# EAGLE board M6_GPOI_V4.1_after_labelling (EAGLE 9.6.2)
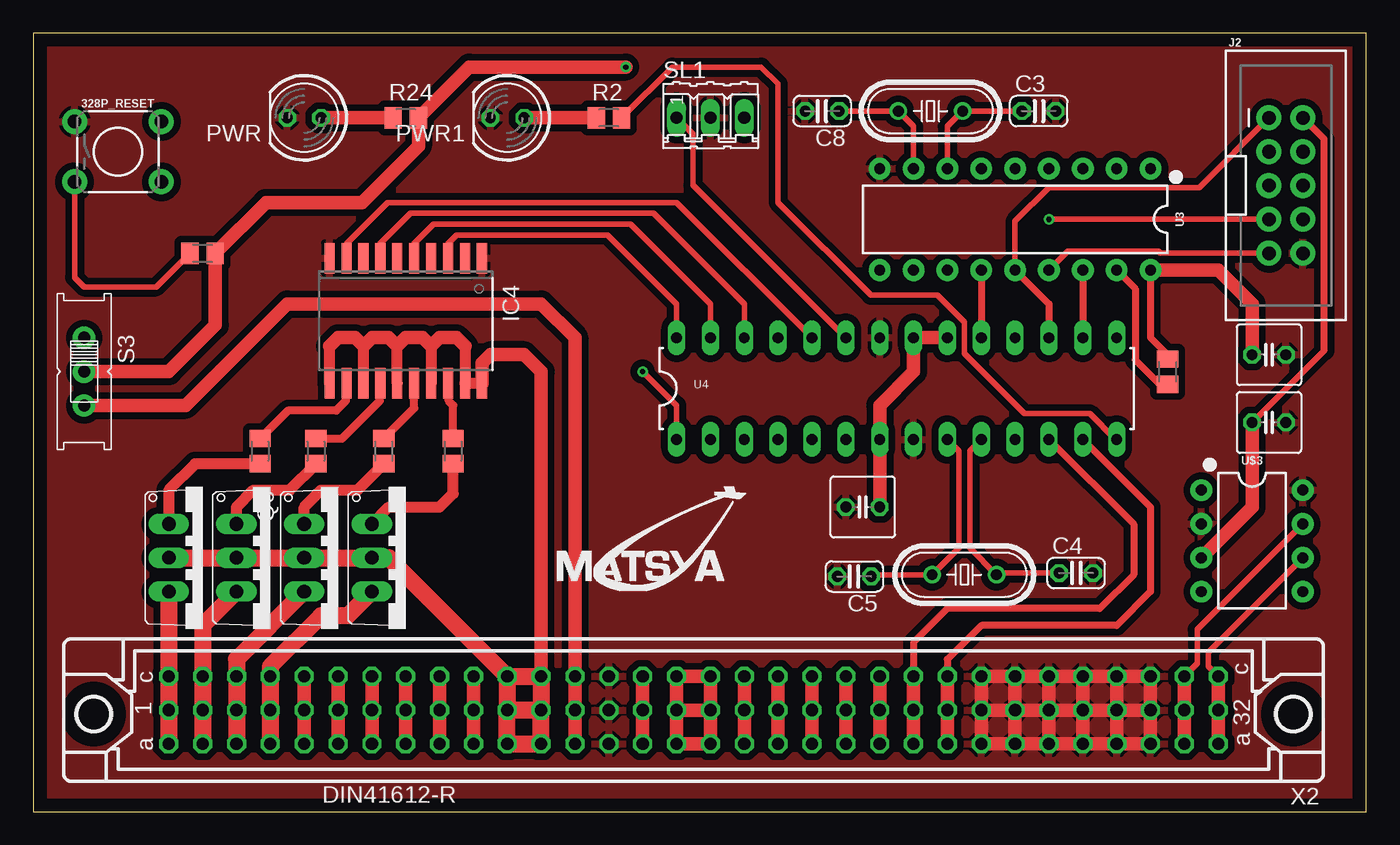
[diagram p0: board, top side]
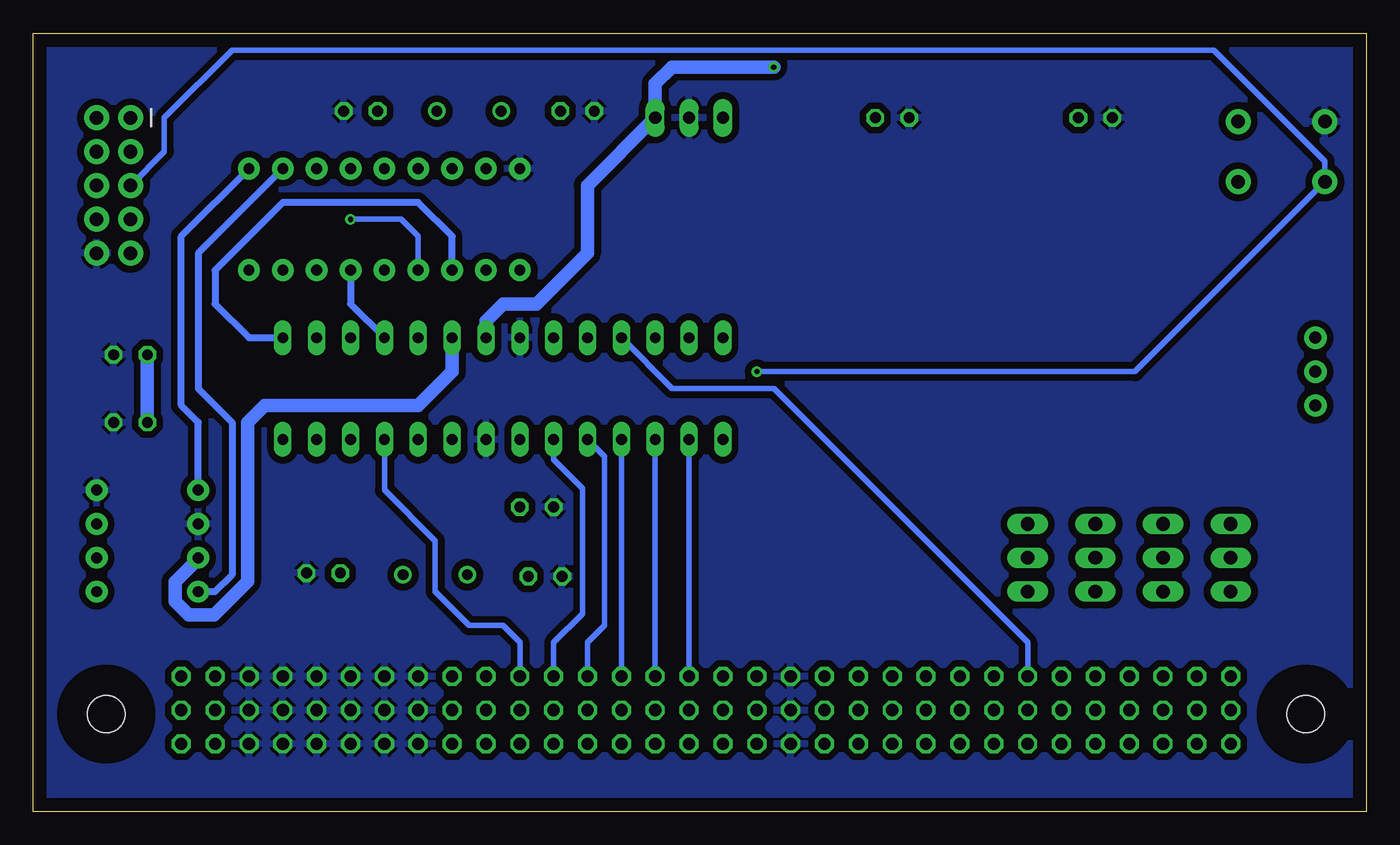
[diagram p1: board, bottom side, seen from below]

Size 100 x 58.41 mm. Coordinates in mm from the lower left corner, seen from the top.
Outline: 0,0 100,0 100,58.41 0,58.41 0,0
Copper layers (1*16): Top 0.035mm / dielectric 1.5mm / Bottom 0.035mm
Design rules "default *": minimum track width 6mil, minimum drill 0.35mm, track to track 16mil, track to pad 16mil, pad to pad 6mil, via to via 16mil, smd to smd 16mil, copper to edge 40mil, drill to drill 6mil, minimum pad ring 10mil, minimum via ring 8mil, stop-mask expansion 4mil, vias tented up to drill 0mil, thermal gap 10mil
Net classes: 1 CAN: width 0.406 mm, drill 0.381 mm, clearance 0.381 mm; 2 POWER: width 0.203 mm; 3 CRYSTAL: width 0.406 mm

## Footprints (pad centres in the part's own frame; a part is rotated, then mirrored left to right if it is on the bottom)
TACTILE_SWITCH_PTH_6.0MM = drill 1.016 pad 1.88: 1 -3.251,2.261; 2 3.251,2.261; 3 -3.251,-2.261; 4 3.251,-2.261
C025-050X050 = drill 0.813 octagon: 1 -1.27,0; 2 1.27,0
C025-024X044 = drill 0.813 octagon: 1 -1.27,0; 2 1.27,0
ROBOSUB_LINEAR-TECHNOLOGY_LT1161_QUAD-HIGH-SIDE-MOSFET-DRIVER_SO20 = smd 0.762 x 2.286: 1 -5.715,-4.7; 2 -4.445,-4.7; 3 -3.175,-4.7; 4 -1.905,-4.7; 5 -0.635,-4.7; 6 0.635,-4.7; 7 1.905,-4.7; 8 3.175,-4.7; 9 4.445,-4.7; 10 5.715,-4.7; 11 5.715,4.7; 12 4.445,4.7; 13 3.175,4.7; 14 1.905,4.7; 15 0.635,4.7; 16 -0.635,4.7; 17 -1.905,4.7; 18 -3.175,4.7; 19 -4.445,4.7; 20 -5.715,4.7
2X5-SHROUDED = drill 1.016 pad 1.88: 1 -1.27,5.08; 2 1.27,5.08; 3 -1.27,2.54; 4 1.27,2.54; 5 -1.27,0; 6 1.27,0; 7 -1.27,-2.54; 8 1.27,-2.54; 9 -1.27,-5.08; 10 1.27,-5.08
LED5MM = drill 0.813 octagon: A -1.27,0; K 1.27,0
HC49/S = drill 0.813: 1 -2.413,0; 2 2.413,0
TO220V = drill 1.016 long: 1 -2.54,-2.54; 2 0,-2.54; 3 2.54,-2.54
M0805 = smd 1.3 x 1.6: 1 -0.95,0; 2 0.95,0
EG1218 = drill 0.9 pad 1.676: O -2.54,0; P 0,0; S 2.54,0
03P = drill 0.914 long: 1 -2.54,0; 2 0,0; 3 2.54,0
DIP18 = drill 0.813 pad 1.626: 1 -10.16,-3.81; 2 -7.62,-3.81; 3 -5.08,-3.81; 4 -2.54,-3.81; 5 0,-3.81; 6 2.54,-3.81; 7 5.08,-3.81; 8 7.62,-3.81; 9 10.16,-3.81; 10 10.16,3.81; 11 7.62,3.81; 12 5.08,3.81; 13 2.54,3.81; 14 0,3.81; 15 -2.54,3.81; 16 -5.08,3.81; 17 -7.62,3.81; 18 -10.16,3.81
DIL28-3 = drill 0.813 long: 1 -16.51,-3.81; 2 -13.97,-3.81; 3 -11.43,-3.81; 4 -8.89,-3.81; 5 -6.35,-3.81; 6 -3.81,-3.81; 7 -1.27,-3.81; 8 1.27,-3.81; 9 3.81,-3.81; 10 6.35,-3.81; 11 8.89,-3.81; 12 11.43,-3.81; 13 13.97,-3.81; 14 16.51,-3.81; 15 16.51,3.81; 16 13.97,3.81; 17 11.43,3.81; 18 8.89,3.81; 19 6.35,3.81; 20 3.81,3.81; 21 1.27,3.81; 22 -1.27,3.81; 23 -3.81,3.81; 24 -6.35,3.81; 25 -8.89,3.81; 26 -11.43,3.81; 27 -13.97,3.81; 28 -16.51,3.81
DIP08 = drill 0.813 pad 1.626: 1 -3.81,-3.81; 2 -1.27,-3.81; 3 1.27,-3.81; 4 3.81,-3.81; 5 3.81,3.81; 6 1.27,3.81; 7 -1.27,3.81; 8 -3.81,3.81
MABC96R = drill 0.914 octagon: A1 -2.54,39.37; A2 -2.54,36.83; A3 -2.54,34.29; A4 -2.54,31.75; A5 -2.54,29.21; A6 -2.54,26.67; A7 -2.54,24.13; A8 -2.54,21.59; A9 -2.54,19.05; A10 -2.54,16.51; A11 -2.54,13.97; A12 -2.54,11.43; A13 -2.54,8.89; A14 -2.54,6.35; A15 -2.54,3.81; A16 -2.54,1.27; A17 -2.54,-1.27; A18 -2.54,-3.81; A19 -2.54,-6.35; A20 -2.54,-8.89; A21 -2.54,-11.43; A22 -2.54,-13.97; A23 -2.54,-16.51; A24 -2.54,-19.05; A25 -2.54,-21.59; A26 -2.54,-24.13; A27 -2.54,-26.67; A28 -2.54,-29.21; A29 -2.54,-31.75; A30 -2.54,-34.29; A31 -2.54,-36.83; A32 -2.54,-39.37; B1 0,39.37; B2 0,36.83; B3 0,34.29; B4 0,31.75; B5 0,29.21; B6 0,26.67; B7 0,24.13; B8 0,21.59; B9 0,19.05; B10 0,16.51; B11 0,13.97; B12 0,11.43; B13 0,8.89; B14 0,6.35; B15 0,3.81; B16 0,1.27; B17 0,-1.27; B18 0,-3.81; B19 0,-6.35; B20 0,-8.89; B21 0,-11.43; B22 0,-13.97; B23 0,-16.51; B24 0,-19.05; B25 0,-21.59; B26 0,-24.13; B27 0,-26.67; B28 0,-29.21; B29 0,-31.75; B30 0,-34.29; B31 0,-36.83; B32 0,-39.37; C1 2.54,39.37; C2 2.54,36.83; C3 2.54,34.29; C4 2.54,31.75; C5 2.54,29.21; C6 2.54,26.67; C7 2.54,24.13; C8 2.54,21.59; C9 2.54,19.05; C10 2.54,16.51; C11 2.54,13.97; C12 2.54,11.43; C13 2.54,8.89; C14 2.54,6.35; C15 2.54,3.81; C16 2.54,1.27; C17 2.54,-1.27; C18 2.54,-3.81; C19 2.54,-6.35; C20 2.54,-8.89; C21 2.54,-11.43; C22 2.54,-13.97; C23 2.54,-16.51; C24 2.54,-19.05; C25 2.54,-21.59; C26 2.54,-24.13; C27 2.54,-26.67; C28 2.54,-29.21; C29 2.54,-31.75; C30 2.54,-34.29; C31 2.54,-36.83; C32 2.54,-39.37 | hole 2.794: -0.305,45; -0.305,-45

## Placement (x,y rotation side)
328P_RESET  MOMENTARY-SWITCH-SPST-PTH-6.0MM  [TACTILE_SWITCH_PTH_6.0MM]  6.35,49.53 0 top
C1  10u  [C025-050X050]  62.23,22.86 180 top
C2  10u  [C025-050X050]  92.71,29.21 0 top
C3  22p  [C025-024X044]  75.44,52.58 0 top
C4  22p  [C025-024X044]  78.23,17.91 0 top
C5  22p  [C025-024X044]  61.59,17.65 180 top
C8  22p  [C025-024X044]  59.18,52.58 180 top
C9  10u  [C025-050X050]  92.71,34.29 0 top
IC4  LT1161  [ROBOSUB_LINEAR-TECHNOLOGY_LT1161_QUAD-HIGH-SIDE-MOSFET-DRIVER_SO20]  27.94,36.83 180 top
J2  [2X5-SHROUDED]  93.98,46.99 0 top
PWR  [LED5MM]  20.32,52.07 180 top
PWR1  [LED5MM]  35.56,52.07 180 top
Q5  16MHz  [HC49/S]  67.31,52.58 180 top
Q6  [TO220V]  22.86,19.05 270 top
Q7  [TO220V]  17.78,19.05 270 top
Q8  16MHz  [HC49/S]  69.85,17.78 180 top
Q9  [TO220V]  27.94,19.05 270 top
Q10  [TO220V]  12.7,19.05 270 top
R2  1k  [M0805]  43.18,52.07 0 top
R24  1k  [M0805]  27.94,52.07 0 top
RD1  100  [M0805]  31.5,27.05 90 top
RD2  10K  [M0805]  85.09,33.02 90 top
RD3  10K  [M0805]  12.7,41.91 180 top
RI1  100  [M0805]  26.29,27.05 90 top
RI2  100  [M0805]  21.21,27.05 90 top
RI3  100  [M0805]  17.02,27.05 90 top
S3  [EG1218]  3.81,33.02 270 top
SL1  [03P]  50.8,52.07 0 top
U3  MCP2515  [DIP18]  73.66,44.45 180 top
U4  ATMEGA328P_PDIP  [DIL28-3]  64.77,31.75 0 top
U$3  MCP2561  [DIP08]  91.44,20.32 270 top
X2  MABC96R  [MABC96R]  49.53,7.62 90 top

## Library data of the parts
328P_RESET = SparkFun-Switches; PROD_ID: SWCH-08441; SF_SKU: COM-00097
C1 C2 C9 Q6 Q7 Q9 Q10 S3 = adafruit
C3-C5 C8 = resistor
IC4 = LT1161; MF: INTERSIL; MPN: HIP4086ABZ; OC_FARNELL: 1561974; OC_NEWARK: 20J4468
J2 = SparkFun-Connectors; PROD_ID: CONN-08671; SF_ID: PRT-08506
PWR PWR1 = led
Q5 Q8 = crystal; OC_FARNELL: 1667008; OC_NEWARK: unknown
R2 R24 RD1-RD3 RI1-RI3 = rcl; SPICEPREFIX: R
SL1 = con-amp-quick; OC_FARNELL: unknown; OC_NEWARK: unknown
U3 = SparkFun-IC-Comms; PROD_ID: NA-XXXXX
U4 = SparkFun-DigitalIC
U$3 = LMZ22005TZ
X2 = con-vg; OC_FARNELL: unknown

## Nets
C_N [CRYSTAL]: C8.1 Q5.2 U3.8
C_P [CRYSTAL]: C3.1 Q5.1 U3.7
CAN1_N [CAN]: U$3.6 X2.A32 X2.B32 X2.C32
CAN1_P [CAN]: U$3.7 X2.A31 X2.B31 X2.C31
CAN_INT: U3.12 U4.15
CAN_MISO: J2.9 U3.15 U4.18
CAN_MOSI: J2.1 U3.14 U4.17
CAN_N [CAN]: X2.A10 X2.B10 X2.C10
CAN_P [CAN]: X2.A9 X2.B9 X2.C9
CAN_SCK: J2.7 U3.13 U4.19
CAN_SCK_M: X2.A5 X2.B5 X2.C5
CAN_SS: U3.16 U4.16
CAN_STAT_1: R2.2 U4.14
CRY_N [CRYSTAL]: C5.1 Q8.2 U4.9
CRY_P [CRYSTAL]: C4.1 Q8.1 U4.10
CUSTOMPIN1_M: X2.A15 X2.B15 X2.C15
DGND: 328P_RESET.1 C1.2 C2.2 C3.2 C4.2 C5.2 C8.2 C9.2 IC4.1 IC4.10 J2.10 PWR1.K PWR.K SL1.2 U3.9 U4.8 U4.22 U$3.2 U$3.8 X2.A14 X2.A25 X2.A26 X2.A27 X2.A28 X2.A29 X2.A30 X2.B14 X2.B25 X2.B26 X2.B27 X2.B28 X2.B29 X2.B30 X2.C14 X2.C25 X2.C26 X2.C27 X2.C28 X2.C29 X2.C30
G1: IC4.18 RD1.2
GPIO_POWER [POWER]: C1.1 C2.1 C9.1 J2.2 R24.2 RD2.2 RD3.1 S3.P SL1.3 U3.18 U4.7 U4.20 U4.21 U$3.3
GPIO_POWER_IP: S3.S X2.A13 X2.B13 X2.C13
INT_1: U4.25 X2.A7 X2.B7 X2.C7
INT_2: X2.A8 X2.B8 X2.C8
MOSI_M: X2.A6 X2.B6 X2.C6
N$1: PWR1.A R2.1
N$6: U3.1 U$3.1
N$7: U3.2 U$3.4
N$8: RD2.1 U3.17
N$29: IC4.14 RI2.2
N$30: IC4.12 RI3.2
N$31: PWR.A R24.1
PNEU_1: Q10.3 X2.A1 X2.B1 X2.C1
PNEU_1_IN: IC4.9 U4.24
PNEU_1_OUT: Q10.1 RI3.1
PNEU_2: Q7.3 X2.A2 X2.B2 X2.C2
PNEU_2_IN: IC4.7 U4.26
PNEU_2_OUT: Q7.1 RI2.1
PNEU_3: Q6.3 X2.A3 X2.B3 X2.C3
PNEU_3_IN: IC4.5 U4.27
PNEU_3_OUT: Q6.1 RI1.1
PNEU_4: Q9.3 X2.A4 X2.B4 X2.C4
PNEU_4_IN: IC4.3 U4.28
PNEU_4_OUT: Q9.1 RD1.1
POWER: IC4.11 IC4.13 IC4.15 IC4.17 IC4.19 IC4.20 Q6.2 Q7.2 Q9.2 Q10.2 X2.A11 X2.A12 X2.B11 X2.B12 X2.C11 X2.C12
PS_1: SL1.1 U4.23
PWM1: U4.13 X2.A24 X2.B24 X2.C24
PWM2: U4.12 X2.A23 X2.B23 X2.C23
PWM3: U4.11 X2.A22 X2.B22 X2.C22
PWM4: U4.6 X2.A21 X2.B21 X2.C21
PWM5: U4.5 X2.A20 X2.B20 X2.C20
PWM6: U4.4 X2.A19 X2.B19 X2.C19
PWM7: U4.3 X2.A18 X2.B18 X2.C18
PWM8: U4.2 X2.A16 X2.A17 X2.B16 X2.B17 X2.C16 X2.C17
RESET: 328P_RESET.3 J2.5 RD3.2 U4.1
S1: IC4.16 RI1.2

## Tracks (layer width: path | path; a pad name or v marks a point on that pad's centre or on a via)
C_N
  Top 0.406: U3.8 66.04,51.44 Q5.2 C8.1
C_P
  Top 0.406: U3.7 68.58,51.44 Q5.1 C3.1
CAN1_N
  Top 0.406: X2.C32 88.14,10.92 88.14,11.94 U$3.6
  Top 1.016: X2.C32 X2.B32 X2.A32
CAN1_P
  Top 0.406: U$3.7 87.33,13.66 87.33,11.12 X2.C31
  Top 1.016: X2.C31 X2.B31 X2.A31
CAN_INT
  Bottom 0.508: U3.12 68.58,43.18 71.12,45.72 81.28,45.72 86.36,40.64 86.36,38.1 83.82,35.56 U4.15
CAN_MISO
  Top 0.406: J2.9 84.56,41.91 84.41,42.06 77.62,42.06 U3.15
  Bottom 0.508: U3.15 76.2,38.1 U4.18
CAN_MOSI
  Top 0.406: J2.1 87.48,46.84 76.2,46.84 73.66,44.3 U3.14
  Top 0.508: U3.14 76.2,38.1 U4.17
CAN_N
  Top 1.016: X2.C10 X2.B10 X2.A10
CAN_P
  Top 1.016: X2.C9 X2.B9 X2.A9
CAN_SCK  (via drill 0.38)
  Top 0.406: J2.7 v76.2,44.45
  Top 0.508: U3.13 U4.19
  Bottom 0.406: v76.2,44.45 72.39,44.45 71.12,43.18 U3.13
CAN_SCK_M
  Top 1.016: X2.C5 X2.B5 X2.A5
CAN_SS
  Top 0.508: U3.16 U4.16
CAN_STAT_1
  Top 0.406: R2.2 47.94,55.88 54.61,55.88 55.88,54.61 55.88,45.72 62.84,38.76 67.84,38.76 69.85,36.75 69.85,34.37 74.35,29.87 79.27,29.87 81.2,27.94 U4.14
CRY_N
  Top 0.406: U4.9 69.44,27.08 69.44,19.79 Q8.2 62.99,17.78 C5.1
CRY_P
  Top 0.406: U4.10 70.26,27.08 70.26,19.79 Q8.1 72.39,17.91 C4.1
CUSTOMPIN1_M
  Top 1.016: X2.C15 X2.B15 X2.A15
DGND
  Top 1.016: X2.C29 X2.C30 X2.B30 | X2.C29 X2.C28 | X2.C28 X2.C27 | X2.C27 X2.C26 | X2.C26 X2.C25 X2.B25 | X2.B25 X2.A25 X2.A26 | X2.A26 X2.B26 | X2.B26 X2.B25 | X2.B26 X2.C26 | X2.A26 X2.A27 | X2.A27 X2.B27 | X2.B27 X2.B26 | X2.B27 X2.C27 | X2.B27 X2.B28 | X2.B28 X2.C28 | X2.A27 X2.A28 | X2.A28 X2.B28 | X2.B28 X2.B29 | X2.B29 X2.C29 | X2.B29 X2.B30 | X2.A29 X2.B29 | X2.A28 X2.A29 | X2.A29 X2.A30 X2.B30
  pour Top (isolate 0.508): 0,59.69 101.6,59.69 101.6,-1.27 -2.54,-1.27 -2.54,59.69
  pour Bottom (isolate 0.508): -3.81,59.69 -3.81,-2.54 104.14,-2.54 104.14,62.23 -3.81,62.23
G1
  Top 0.61: RD1.2 31.5,30.49 31.17,30.82 31.17,32.08 IC4.18
GPIO_POWER  (via drill 0.38)
  Top 0.406: C2.1 96.85,34.62
  Top 0.508: U3.18 83.82,35.56 85.09,34.29 RD2.2 | J2.2 96.85,50.47 96.85,34.62
  Top 1.016: S3.P 10.16,33.02 13.65,36.51 RD3.1 17.46,45.72 24.65,45.72 28.89,49.96 R24.2 32.7,55.88 v44.45,55.88 | U$3.3 91.44,22.86 C2.1 | C9.1 91.44,38.1 88.9,40.64 U3.18 | U4.20 U4.21 66.04,33.02 63.5,30.48 U4.7 C1.1
  Bottom 1.016: C9.1 C2.1 | U4.20 68.58,33.02 71.12,30.48 82.65,30.48 83.92,29.21 83.92,17.3 86.44,14.78 88.34,14.78 89.36,15.79 89.36,17.23 87.63,18.95 U$3.3 | U4.21 66.04,36.83 64.77,38.1 62.23,38.1 58.42,41.91 58.42,46.99 SL1.3 53.34,54.61 52.07,55.88 v44.45,55.88
GPIO_POWER_IP
  Top 1.016: S3.S 11.43,30.48 19.05,38.1 38.1,38.1 40.64,35.56 X2.C13 X2.B13 X2.A13
INT_1
  Top 1.016: X2.C7 X2.B7 X2.A7
  Bottom 0.406: U4.25 52.07,31.75 44.45,31.75 25.4,12.7 X2.C7
INT_2
  Top 1.016: X2.C8 X2.B8 X2.A8
MOSI_M
  Top 1.016: X2.C6 X2.B6 X2.A6
N$1
  Top 1.016: PWR1.A R2.1
N$6
  Bottom 0.508: U$3.1 87.63,29.21 88.9,30.48 88.9,43.18 U3.1
N$7
  Bottom 0.508: U3.2 85.45,44.09 87.63,41.91 87.63,31.75 85.09,29.21 85.09,17.78 86.36,16.51 U$3.4
N$8
  Top 0.508: U3.17 82.68,39.24 82.68,33.91 84.52,32.07 RD2.1
N$29
  Top 0.61: IC4.14 25.98,32.08 25.98,30.82 23.17,28 RI2.2
N$30
  Top 0.61: IC4.12 23.44,32.08 23.44,30.82 22.72,30.1 19.12,30.1 RI3.2
N$31
  Top 1.016: PWR.A R24.1
PNEU_1
  Top 1.27: Q10.3 X2.C1 X2.B1 X2.A1
PNEU_1_IN
  Top 0.406: U4.24 48.26,45.72 26.57,45.72 23.5,42.65 IC4.9
PNEU_1_OUT
  Top 0.813: RI3.1 12.13,26.1 10.16,24.13 Q10.1
PNEU_2
  Top 1.27: Q7.3 12.7,13.97 X2.C2 X2.B2 X2.A2
PNEU_2_IN
  Top 0.406: U4.26 53.34,38.1 46.53,44.91 28.3,44.91 26.04,42.65 IC4.7
PNEU_2_OUT
  Top 0.813: Q7.1 15.24,22.86 16.51,24.13 19.24,24.13 RI2.1
PNEU_3
  Top 1.27: Q6.3 15.24,11.43 X2.C3 X2.B3 X2.A3
PNEU_3_IN
  Top 0.406: U4.27 50.8,38.1 44.8,44.09 30.02,44.09 28.57,42.65 IC4.5
PNEU_3_OUT
  Top 0.813: Q6.1 20.32,22.86 21.59,24.13 24.32,24.13 RI1.1
PNEU_4
  Top 1.27: Q9.3 23.6,14.71 21.59,14.71 17.78,10.9 X2.C4 X2.B4 X2.A4
PNEU_4_IN
  Top 0.406: U4.28 48.26,38.1 43.08,43.28 31.75,43.28 31.11,42.65 IC4.3
PNEU_4_OUT
  Top 0.813: Q9.1 26.67,22.86 30.48,22.86 31.5,23.88 RD1.1
POWER
  Top 0.813: 32.38,34.92 IC4.19 IC4.20 | 29.84,34.92 IC4.17 | IC4.15 27.3,34.92 | IC4.13 24.77,34.92 | IC4.11 22.23,34.92
  Top 1.016: X2.C12 38.1,33.02 36.83,34.29 34.29,34.29 33.66,33.66 IC4.20 | 32.38,34.92 31.75,35.56 30.48,35.56 29.84,34.92 29.21,35.56 27.94,35.56 27.3,34.92 26.67,35.56 25.4,35.56 24.77,34.92 24.13,35.56 22.86,35.56 22.23,34.92
  Top 1.27: Q10.2 Q7.2 Q6.2 Q9.2 26.67,19.05 X2.C11 | X2.C11 X2.B11 | X2.B11 X2.A11 X2.A12 X2.B12 | X2.C11 X2.C12 X2.B12 | X2.B12 X2.B11
PS_1
  Top 0.406: SL1.1 49.48,50.85 49.48,47 60.92,35.56 U4.23
PWM1
  Top 0.508: U4.13 83.82,22.86 83.82,16.51 81.28,13.97 71.12,13.97 68.58,11.43 X2.C24
  Top 1.016: X2.C24 X2.B24 X2.A24
PWM2
  Top 0.508: U4.12 82.55,21.59 82.55,17.78 80.01,15.24 68.58,15.24 66.04,12.7 X2.C23
  Top 1.016: X2.C23 X2.B23 X2.A23
PWM3
  Top 1.016: X2.C22 X2.B22 X2.A22
  Bottom 0.406: X2.C22 63.5,12.7 64.77,13.97 67.31,13.97 69.85,16.51 69.85,20.32 73.66,24.13 U4.11
PWM4
  Top 1.016: X2.C21 X2.B21 X2.A21
  Bottom 0.406: U4.6 60.96,26.42 58.8,24.26 58.8,14.86 60.96,12.7 X2.C21
PWM5
  Top 1.016: X2.C20 X2.B20 X2.A20
  Bottom 0.406: U4.5 57.15,26.67 57.15,13.97 58.42,12.7 X2.C20
PWM6
  Top 1.016: X2.C19 X2.B19 X2.A19
  Bottom 0.406: U4.4 X2.C19
PWM7
  Top 1.016: X2.C18 X2.B18 X2.A18
  Bottom 0.406: U4.3 X2.C18
PWM8
  Top 1.016: X2.B16 X2.C16 X2.C17 X2.B17 | X2.B16 X2.A16 X2.A17 X2.B17 | X2.B17 X2.B16
  Bottom 0.406: U4.2 X2.C17
RESET  (via drill 0.38)
  Top 0.406: 328P_RESET.3 3.1,40.08 3.81,39.37 9.21,39.37 RD3.2 | v45.72,33.02 48.26,30.48 U4.1
  Bottom 0.406: v45.72,33.02 17.35,33.02 328P_RESET.3 3.1,48.82 11.43,57.15 85.09,57.15 90.17,52.07 90.17,49.53 J2.5
S1
  Top 0.61: RI1.2 28.57,30.29 IC4.16